# Altium PCB TAG_V2.PcbDoc (part 1 of 2)
Units mm, origin at the board's own origin, x right, y up, seen from the top; angles counter-clockwise.
Board outline 19.13 x 23 mm, 6 copper layers (L1, L2, L3, L4, L5, L6), stack 0.922 mm thick; 120 components, 81 nets, 435 pads, 552 vias.
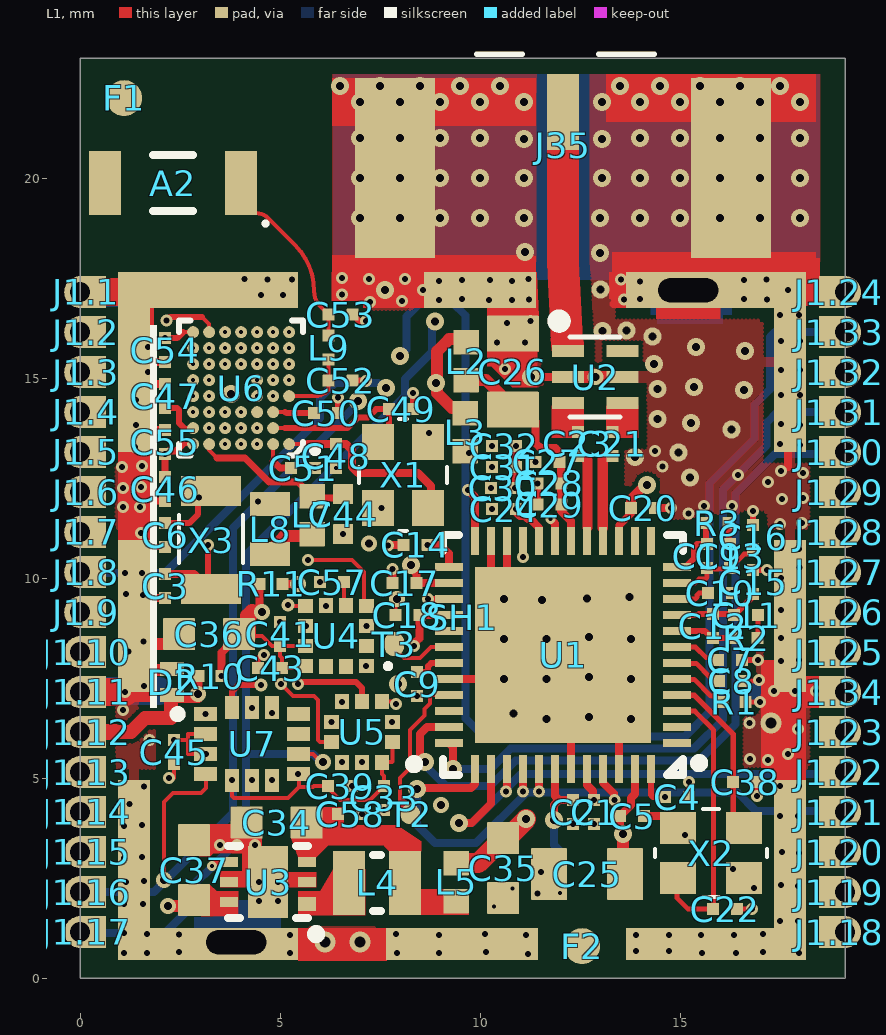
[diagram p0: L1 view]
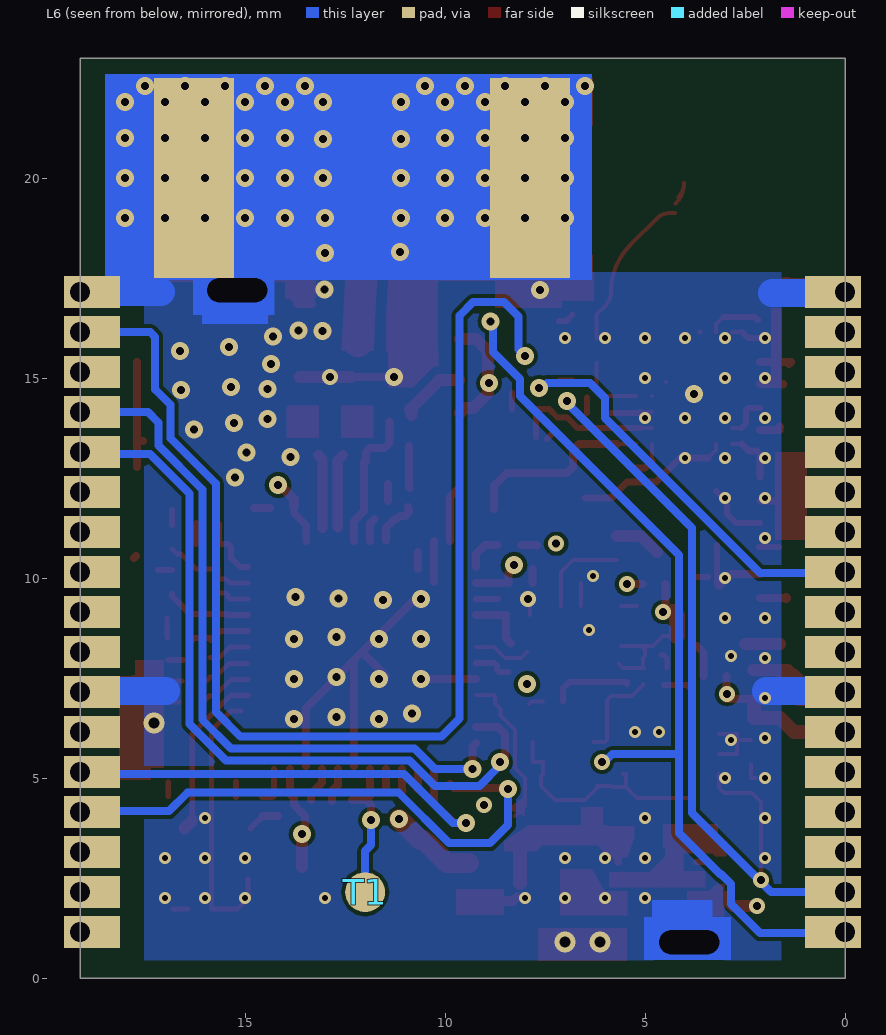
[diagram p1: L6 view, seen from below]
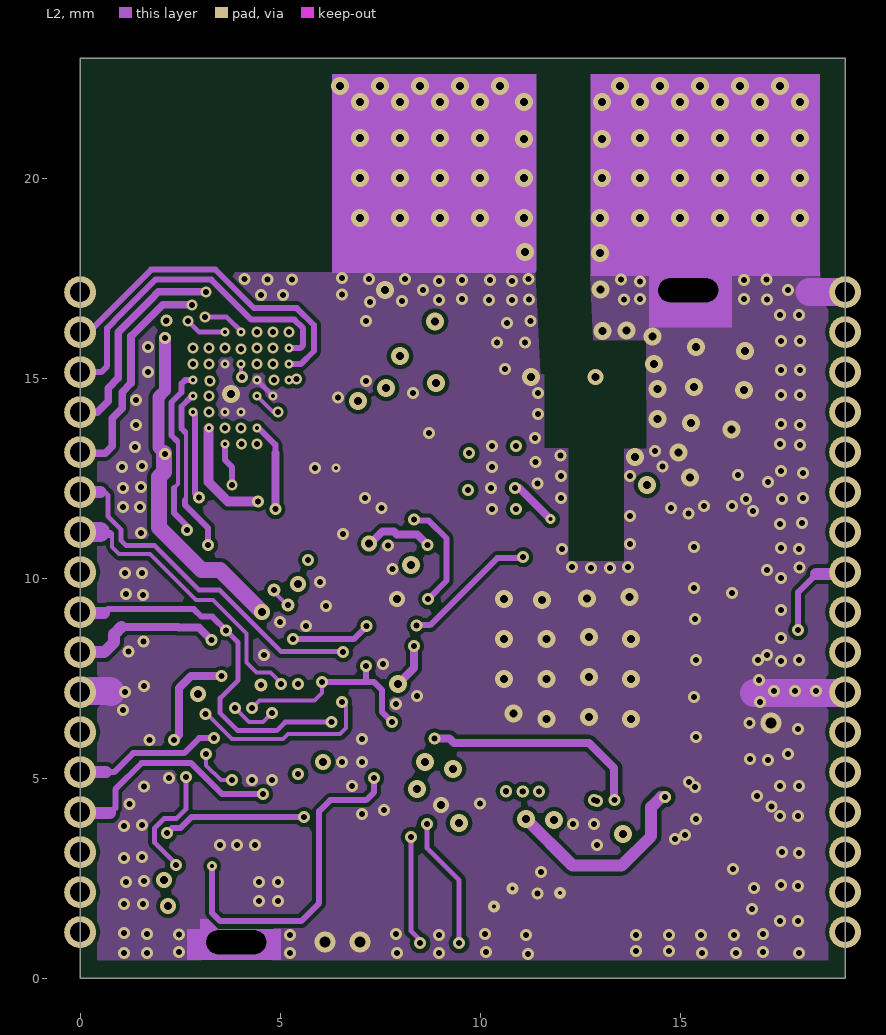
[diagram p2: L2]
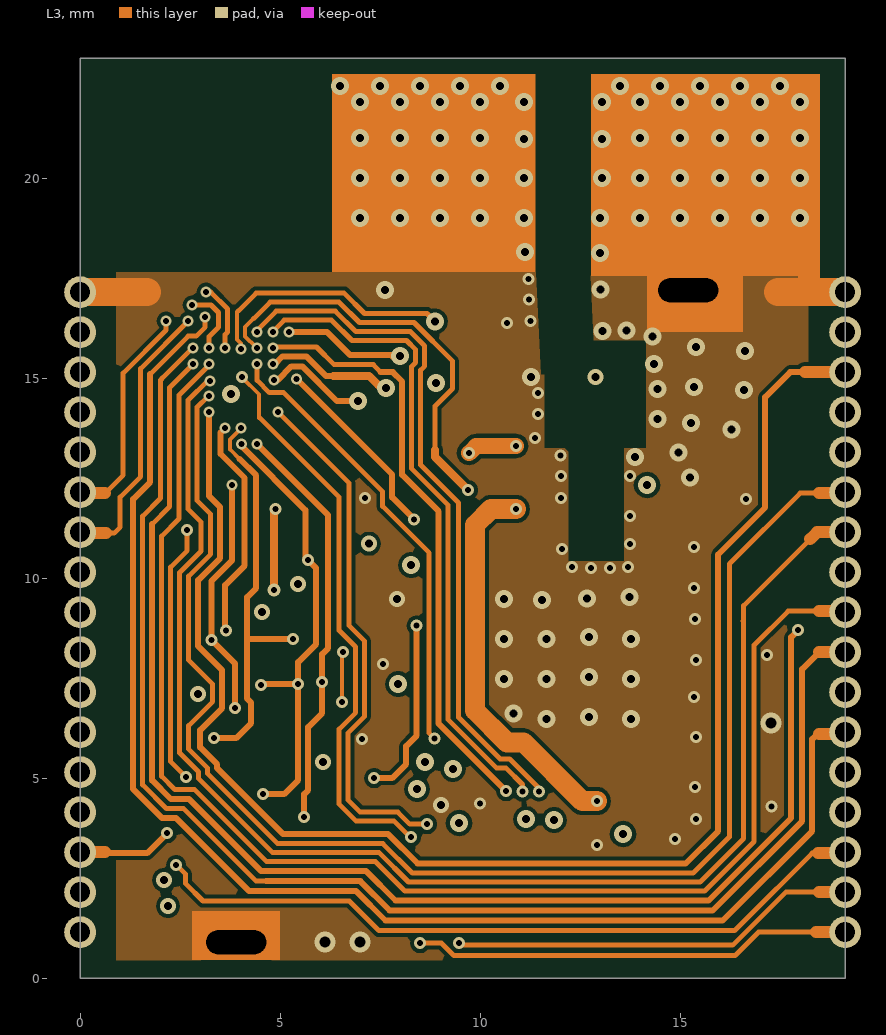
[diagram p3: L3]
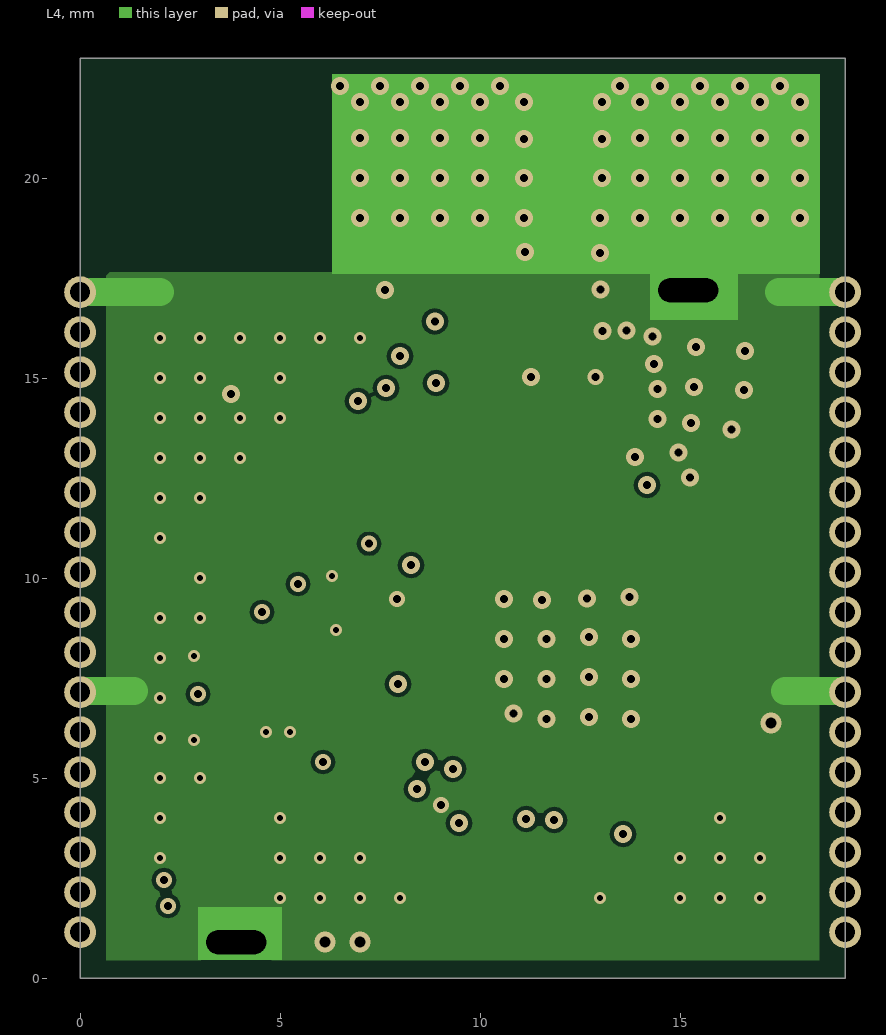
[diagram p4: L4]
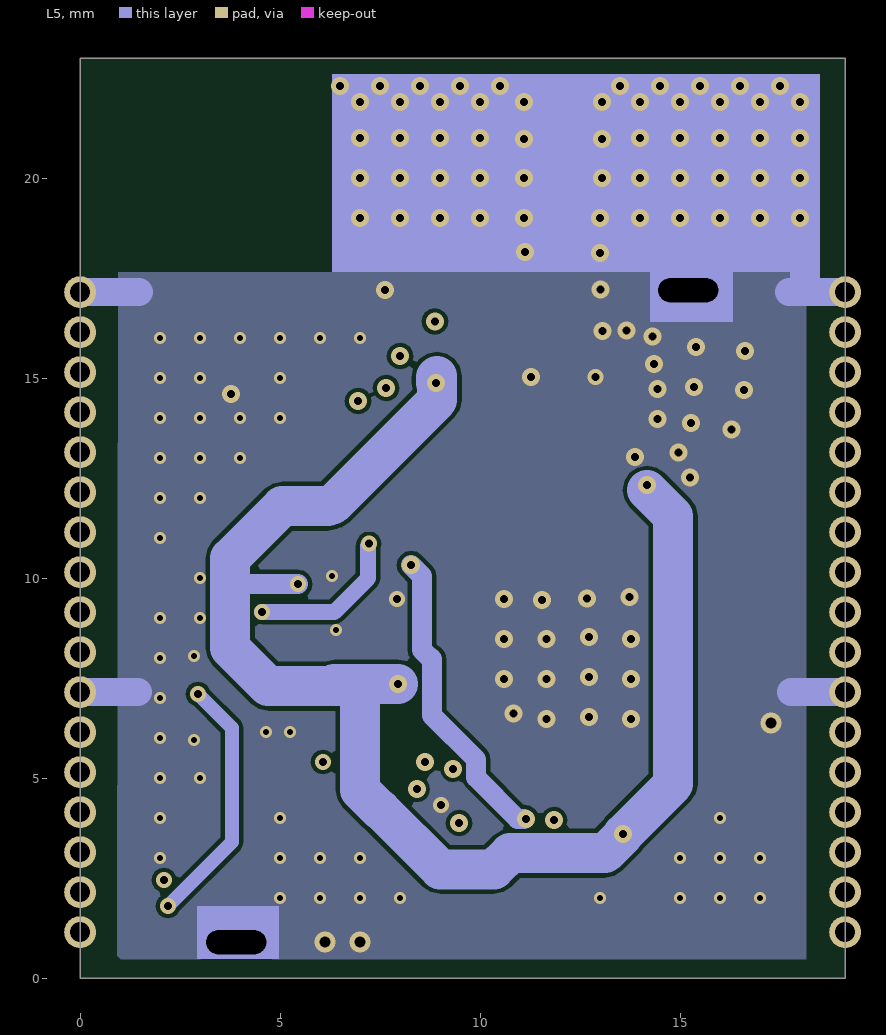
[diagram p5: L5]

## Layer stack, top to bottom
Top Solder: solder mask 0.0127, Solder Resist, Dk 3.5
L1: signal copper 0.029
Dielectric1: prepreg 0.065, Dk 3.8
L2: signal copper 0.029
Dielectric 4: prepreg 0.065, Dk 3.8
L3: signal copper 0.018
Dielectric2: core 0.51, IS400, Dk 4.2
L4: signal copper 0.018
Dielectric 5: prepreg 0.065, Dk 3.8
L5: signal copper 0.029
Dielectric3: prepreg 0.065, Dk 3.8
L6: signal copper 0.029
Bottom Solder: solder mask 0.0127, Solder Resist, Dk 3.5

## Board outline
0,0 0,23 19.125,23 19.125,0

## Design rules (kind name [scope] priority, off if disabled: settings)
Clearance Alearance-ROOM_NRF [WithinRoom('RoomDefinition_nRF')] p1: gap=0.1 ignorepadtopadclearanceinfootprint=FALSE except(0: Arc-Hole Track-Hole SMDPad-Hole THPad-Hole Via-Hole Fill-Hole Poly-Hole Region-Hole Text-Hole)
Clearance Clearance-ANT [InNet('UWB_ANT')] p2: gap=0.265 ignorepadtopadclearanceinfootprint=FALSE except(0: Arc-Hole Track-Hole SMDPad-Hole THPad-Hole Via-Hole Fill-Hole Poly-Hole Region-Hole Text-Hole)
Clearance Clearance-ANT_BT [InNet('BT_ANT')  or InNet('BT_RADIO_ANT')] p3 off: gap=0.2 ignorepadtopadclearanceinfootprint=FALSE except(0: Arc-Hole Track-Hole SMDPad-Hole THPad-Hole Via-Hole Fill-Hole Poly-Hole Region-Hole Text-Hole)
Clearance Clearance_1 [All] p4: gap=0.1 ignorepadtopadclearanceinfootprint=FALSE except(0: Arc-Hole Track-Hole SMDPad-Hole THPad-Hole Via-Hole Fill-Hole Poly-Hole Region-Hole Text-Hole)
ComponentClearance [All] p1 off: gap=0.15 collisioncheckmode=3 verticalgap=0.15 showdistances=FALSE
DiffPairsRouting [All] p1: maxlimit=0.5 minlimit=0.1 mostfreqgap=0.2 toplayer_minwidth=0.1 toplayer_maxwidth=0.381 toplayer_prefwidth=0.22 midlayer1_minwidth=0.1 midlayer1_maxwidth=0.381 midlayer1_prefwidth=0.22 midlayer2_minwidth=0.1 midlayer2_maxwidth=0.381 midlayer2_prefwidth=0.22 midlayer3_minwidth=0.1 midlayer3_maxwidth=0.381 midlayer3_prefwidth=0.22 midlayer4_minwidth=0.1 midlayer4_maxwidth=0.381 midlayer4_prefwidth=0.22 bottomlayer_minwidth=0.1 bottomlayer_maxwidth=0.381 bottomlayer_prefwidth=0.22 maxuncoupledlength=2
HoleSize [All] p1: absolutevalues=TRUE maxlimit=2.54 minlimit=0.1 maxpercent=80.000 minpercent=20.000
HoleToHoleClearance HoleToHoleClearance_1 [InDrillLayerPair('L2 - L3')] p1: gap=0 allowstackedmicrovias=TRUE
HoleToHoleClearance HoleToHoleClearance_2 [InDrillLayerPair('L1 - L2')] p2: gap=0 allowstackedmicrovias=TRUE
HoleToHoleClearance "BGA hole clearance" [HasFootprint('BGA50C40P7X8_295X322X50')] p3: gap=0.1 allowstackedmicrovias=TRUE
HoleToHoleClearance [All] p4: gap=0.254 allowstackedmicrovias=TRUE
MinimumSolderMaskSliver MinimumSolderMaskSliver_2 [(HasFootprint('IC_LGA-12') OR HasFootprint('IC_LGA-14'))] p1: minsoldermaskwidth=0
MinimumSolderMaskSliver MinimumSolderMaskSliver_1 [HasFootprint('HLGA-10L')] p2: minsoldermaskwidth=0
MinimumSolderMaskSliver [All] p3: minsoldermaskwidth=0.1
MinimumSolderMaskSliver "Solder mask dam" [All] p4: minsoldermaskwidth=0.14
PlaneConnect [All] p1: planeconnectstyle=Relief reliefexpansion=0.508 reliefentries=4 reliefconductorwidth=0.3 reliefairgap=0.254
PolygonConnect shield [HasFootprint('BMI-S102')] p1: connectstyle=Relief reliefconductorwidth=0.254 reliefentries=4 polygonreliefangle="90 Angle" airgapwidth=0.254
PolygonConnect SMA [HasFootprint('SMA_KHD3800')] p2: connectstyle=Direct reliefconductorwidth=0.254 reliefentries=4 polygonreliefangle="90 Angle" airgapwidth=0.254
PolygonConnect PolygonConnect_3 [All vs IsNamedPolygon('L1_3V0_L') or IsNamedPolygon('L1_GND2')] p3: connectstyle=Direct reliefconductorwidth=0.254 reliefentries=4 polygonreliefangle="90 Angle" airgapwidth=0.254
PolygonConnect PolygonConnect_2 [InNet('ANT_PCB')] p4: connectstyle=Direct reliefconductorwidth=0.254 reliefentries=4 polygonreliefangle="90 Angle" airgapwidth=0.254
PolygonConnect [IsVia and InNet(gnd) OR InNet('+1V8')  OR InNet('DW+3V3')  OR InNet('+3V3')  OR InNet('+3V3_DW')   OR InNet('NetL1_1')] p5: connectstyle=Direct reliefconductorwidth=0.3 reliefentries=4 polygonreliefangle="90 Angle" airgapwidth=0.2
PolygonConnect PolygonConnect_1 [All] p6: connectstyle=Relief reliefconductorwidth=0.3 reliefentries=4 polygonreliefangle="90 Angle" airgapwidth=0.2
RoutingVias "uVias L2-L3 L4-L5" [((StartLayer='L2') and (StopLayer = 'L3')) or   ((StartLayer='L4') and (StopLayer = 'L5'))] p1: holewidth=0.1 width=0.25 viastyle="Through Hole" minholewidth=0.1 minwidth=0.23 maxholewidth=0.15 maxwidth=0.35
RoutingVias "uVias L1-L2 L5-L6" [((StartLayer='L1') and (StopLayer = 'L2')) or   ((StartLayer='L5') and (StopLayer = 'L6'))] p2: holewidth=0.1 width=0.25 viastyle="Through Hole" minholewidth=0.1 minwidth=0.23 maxholewidth=0.2 maxwidth=0.35
RoutingVias "uVias L1-L6" [((StartLayer='L1') and (StopLayer = 'L6'))] p3: holewidth=0.2 width=0.4 viastyle="Through Hole" minholewidth=0.15 minwidth=0.32 maxholewidth=0.711 maxwidth=0.6
RoutingVias "uVias L3-L4" [((StartLayer='L3') and (StopLayer = 'L4'))] p4: holewidth=0.2 width=0.4 viastyle="Through Hole" minholewidth=0.15 minwidth=0.32 maxholewidth=0.27 maxwidth=0.45
SilkToSilkClearance [All] p1 off: silktosilkclearance=0.1
SilkToSolderMaskClearance [IsPad] p1 off: minsilkscreentomaskgap=0.1 clearancetoexposedcopper=TRUE
SolderMaskExpansion [All] p1: expansion=0.03
ViasUnderSMD [All] p1: allowed=TRUE
Width [All] p1: maxlimit=1 minlimit=0.1 preferedwidth=0.2 checkconnectedcopper=TRUE
22 further rules are at their usual default settings.

## Classes and differential pairs
net class DIFF100: DW_RF_N DW_RF_P
component class "[06] - SPI I2C devices": C33 C39 C41 C43 C45 C57 U4 U5 U7
component class "[03] - CORE MCU": A2 C3 C6 C36 C44 C46 C47 C48 C49 C50 C51 C52 C53 C54 C55 F1 F2 J1.2 J1.3 J1.4 J1.5 J1.6 J1.7 J1.8 J1.9 J1.10 J1.13 J1.14 J1.15 J1.16 J1.17 J1.18 J1.19 J1.20 J1.23 J1.24 J1.25 J1.26 J1.27 J1.28 J1.29 J1.32 J1.33 J14 J18 J27 L7 L8 L9 SH1 U6 X1 X3
component class "[04] - DW radio": C1 C2 C4 C5 C7 C8 C9 C10 C11 C12 C13 C14 C15 C16 C17 C18 C19 C20 C21 C22 C23 C24 C25 C26 C27 C28 C29 C30 C31 C32 C38 J1.21 J1.22 J1.30 J1.31 J35 L2 L3 R1 R2 R3 T1 T2 T3 U1 U2 X2
component class "[05] - Power supply": C34 C35 C37 C58 D2 J1.1 J1.11 J1.12 J1.24 L4 L5 R10 R11 U3 U8
differential pair DW_RF: +DW_RF_P -DW_RF_N
differential pair BALUN_RF: +BALUN_RF_P -BALUN_RF_N

## Components (designator, comment, footprint, x,y, rotation, side; value= is the part's Value field where it differs from the comment)
A2 "AT3216-B2R7HAAT" AT3216 2.325,19.875 r180 top
C1 "100nF" C0201 12.85,4.15 r90 top
C2 "100nF" C0201 12.325,4.15 r90 top
C3 "12pF" C0201 2.125,9.8 r90 top
C4 "100nF" C0201 14.925,4.525 r180 top
C5 "100nF" C0201 13.8,4.05 r180 top
C6 "12pF" C0201 2.125,11.075 r90 top
C7 "100nF" C0201 16.25,7.95 r0 top
C8 "100nF" C0201 16.275,7.425 r0 top
C9 "100nF" C0201 8.425,7.35 r270 top
C10 "100nF" C0201 16,9.625 r0 top
C11 "27pF" C0201 16.65,9.075 r0 top
C12 "1.2pF" C0201 15.825,8.8 r270 top
C13 "820pF" C0201 16.25,10.55 r270 top
C14 "100nF" C0201 8.39,10.83 r0 top
C15 "100nF" C0201 16.825,9.9 r270 top
C16 "100nF" C0201 16.825,11.025 r270 top
C17 "100nF" C0201 8.11,9.875 r0 top
C18 "100nF" C0201 8.18,9.075 r0 top
C19 "18pF" C0201 15.675,10.55 r270 top
C20 "10nF" C0201 14.075,11.75 r0 top
C21 "12pF" C0201 13.305,13.355 r270 top
C22 "12pF" C0201 16.125,1.725 r180 top
C23 "12pF" C0201 12.445,13.355 r270 top
C24 "100nF" C0201 10.6,11.725 r0 top
C25 "47uF" C0805 12.675,2.6 r0 top
C26 "22uF" C0805 10.82,15.16 r270 top
C27 "100nF" C0201 11.68,12.9 r0 top
C28 "330pF" C0201 11.73,12.37 r0 top
C29 "12pF" C0201 11.73,11.84 r0 top
C30 "12pF" C0201 10.575,12.25 r0 top
C31 "330pF" C0201 10.6,12.775 r0 top
C32 "100nF" C0201 10.6,13.3 r0 top
C33 "100nF" C0201 7.6,4.5 r90 top
C34 "10uF" C0603 4.915,3.89 r0 top
C35 "4.7uF" C0603 10.575,2.75 r90 top
C36 "10uF" C0603 3.225,8.6 r0 top
C37 "10uF" C0603 2.85,2.7 r270 top
C38 "12pF" C0201 16.625,4.9 r180 top
C39 "100nF" C0201 6.5,4.8 r180 top
C41 "100nF" C0201 5,8.6 r270 top
C43 "100nF" C0201 4.75,7.75 r0 top
C44 "1uF" C0402 6.575,11.6 r90 top
C45 "100nF" C0201 2.35,5.65 r90 top
C46 "12pF" C0201 2.125,12.225 r90 top
C47 "100nF" C0201 2.125,14.55 r270 top
C48 "12pF" C0201 6.4,13.05 r90 top
C49 "12pF" C0201 8.025,14.225 r180 top
C50 "100pF" C0201 6.15,14.125 r180 top
C51 "100pF" C0201 5.575,12.75 r180 top
C52 "1pF" C0201 6.515,14.935 r180 top
C53 "TBD" C0201 6.515,16.585 r180 top
C54 "100nF" C0201 2.125,15.7 r90 top
C55 "12pF" C0201 2.125,13.4 r270 top
C57 "220nF" C0201 6.3,9.9 r0 top
C58 "22pF" C0201 6.75,4.1 r180 top
D2 "5V0 ESD" DFN65P100X40-2N 2.3,7.4 r90 top
F1 "FIDUCIAL" FID1#1 1.1,22 r0 top
F2 "FIDUCIAL" FID1#2 12.55,0.8 r0 top
J1.1 "EDGE_PIN" PCB_EDGE_1MM 0,17.15 r90 top
J1.2 "EDGE_PIN" PCB_EDGE_1MM 0,16.15 r90 top
J1.3 "EDGE_PIN" PCB_EDGE_1MM 0,15.15 r90 top
J1.4 "EDGE_PIN" PCB_EDGE_1MM 0,14.15 r90 top
J1.5 "EDGE_PIN" PCB_EDGE_1MM 0,13.15 r90 top
J1.6 "EDGE_PIN" PCB_EDGE_1MM 0,12.15 r90 top
J1.7 "EDGE_PIN" PCB_EDGE_1MM 0,11.15 r90 top
J1.8 "EDGE_PIN" PCB_EDGE_1MM 0,10.15 r90 top
J1.9 "EDGE_PIN" PCB_EDGE_1MM 0,9.15 r90 top
J1.10 "EDGE_PIN" PCB_EDGE_1MM 0,8.15 r90 top
J1.11 "EDGE_PIN" PCB_EDGE_1MM 0,7.15 r90 top
J1.12 "EDGE_PIN" PCB_EDGE_1MM 0,6.15 r90 top
J1.13 "EDGE_PIN" PCB_EDGE_1MM 0,5.15 r90 top
J1.14 "EDGE_PIN" PCB_EDGE_1MM 0,4.15 r90 top
J1.15 "EDGE_PIN" PCB_EDGE_1MM 0,3.15 r90 top
J1.16 "EDGE_PIN" PCB_EDGE_1MM 0,2.15 r90 top
J1.17 "EDGE_PIN" PCB_EDGE_1MM 0,1.15 r90 top
J1.18 "EDGE_PIN" PCB_EDGE_1MM 19.125,1.15 r270 top
J1.19 "EDGE_PIN" PCB_EDGE_1MM 19.125,2.15 r270 top
J1.20 "EDGE_PIN" PCB_EDGE_1MM 19.125,3.15 r270 top
J1.21 "EDGE_PIN" PCB_EDGE_1MM 19.125,4.15 r270 top
J1.22 "EDGE_PIN" PCB_EDGE_1MM 19.125,5.15 r270 top
J1.23 "EDGE_PIN" PCB_EDGE_1MM 19.125,6.15 r270 top
J1.24 "EDGE_PIN" PCB_EDGE_1MM 19.125,17.15 r270 top
J1.25 "EDGE_PIN" PCB_EDGE_1MM 19.125,8.15 r270 top
J1.26 "EDGE_PIN" PCB_EDGE_1MM 19.125,9.15 r270 top
J1.27 "EDGE_PIN" PCB_EDGE_1MM 19.125,10.15 r270 top
J1.28 "EDGE_PIN" PCB_EDGE_1MM 19.125,11.15 r270 top
J1.29 "EDGE_PIN" PCB_EDGE_1MM 19.125,12.15 r270 top
J1.30 "EDGE_PIN" PCB_EDGE_1MM 19.125,13.15 r270 top
J1.31 "EDGE_PIN" PCB_EDGE_1MM 19.125,14.15 r270 top
J1.32 "EDGE_PIN" PCB_EDGE_1MM 19.125,15.15 r270 top
J1.33 "EDGE_PIN" PCB_EDGE_1MM 19.125,16.15 r270 top
J1.34 "EDGE_PIN" PCB_EDGE_1MM 19.125,7.15 r270 top
J35 "SMA/FLANGE" SMA_KHD3800 12.075,21.7 r270 top
L2 "BLM15AG601SN1D" INDC1005X05N 9.65,15.425 r270 top
L3 "BLM15AG601SN1D" INDC1005X05N 9.625,13.65 r90 top
L4 "CKP20164R7M-T" INDC2016X10N 7.425,2.375 r0 top
L5 "15nH" INDC1005X05N 9.4,2.4 r90 top
L7 "15nH" INDC1005X05N 5.8,11.575 r90 top
L8 "10uH" L0603 4.75,11.225 r270 top
L9 "3.3nH" L0201 6.215,15.76 r90 top
R1 "11k" R0201 16.35,6.9 r0 top
R2 "16k" R0201 16.65,8.5 r180 top
R3 "270R" R0201 15.925,11.375 r0 top
R10 "0R" R0201 3.25,7.55 r0 top
R11 "0R" R0201 4.775,9.85 r180 top
SH1 "BMI-S-102" BMI-S102 0.9,0.4 r0 top locked
T1 "TestPAD" Testpad#1 12,2.15 r180 bottom
T2 "TestPAD" Testpad#2 8.25,4.1 r0 top
T3 "TestPAD" Testpad#3 7.85,8.35 r0 top
U1 "DW1000 IC" QFN-48_DW1000 12.075,8.075 r180 top
U2 "HHM1595A1" BALUN_HHM1595A1 12.875,15.025 r270 top
U3 "XC9258B18CER-G" USP-6C 4.7,2.4 r180 top
U4 "LIS2MDLTR" IC_LGA-12 6.4,8.55 r180 top
U5 "LPS22HBTR" HLGA-10L 7.05,6.15 r180 top
U6 "NRF52832-CIAA" BGA50C40P7X8_295X322X50 4.025,14.75 r180 top locked
U7 "LSM6DSLTR" IC_LGA-14 4.3,5.85 r0 top
X1 "32.00 MHz - 2CAS" ABM10 8.075,12.575 r90 top
X2 "38.4000MHz-2CAT" ABM10 15.775,3.125 r0 top
X3 "32.768KHZ-KCBB" XTAL_SMD_3.2X1.5MM 3.275,12.175 r270 top

## Footprints (in the part's own frame and the unit in brackets; to place one, negate y for a bottom-side part, rotate by r counter-clockwise, add the part's x,y. Pads: shape width x height; smd on the part's side, far side on the other; paste and mask are expansions set on the pad)
ABM10 [mm]
  rrect1% 0.9x0.8 smd: 1(-0.825,-0.625) 2(0.825,-0.625) 3(0.825,0.625) 4(-0.825,0.625)
  silkscreen extent -1.4,-1.1 1.4,1.1, body extent -1.24,-1 1.24,1, height 0.51
AT3216 [mm] "Chip Antenna 2-Leads, Body 3,20x1,60mm"
  rect 0.8x1.6 smd: 1(-1.7,0) 2(1.7,0)
  silkscreen extent -2.36,-0.7 0.5,1.06, body extent -1.7,-0.9 1.7,0.9, height 1.41
BALUN_HHM1595A1 [mm]
  rect 0.3x0.8 smd: 1(-0.65,-0.68) 2(0,-0.68) 3(0.65,-0.68) 4(0.65,0.68) 5(0,0.68) 6(-0.65,0.68)
  silkscreen extent -1.54,-1.04 1,0.63, body extent -1,-0.62 1,0.63, height 0.8
BGA50C40P7X8_295X322X50 [mm]
  round 0.3 smd mask-0.03: A1(-1.2,1.4) A2(-0.8,1.4) A3(-0.4,1.4) A4(0,1.4) A5(0.4,1.4) A6(0.8,1.4) A7(1.2,1.4) B2(-0.8,1) B3(-0.4,1) B4(0,1) B5(0.4,1) B6(0.8,1) B7(1.2,1) C2(-0.8,0.6) C3(-0.4,0.6) C4(0,0.6) C5(0.4,0.6) C6(0.8,0.6) C7(1.2,0.6) D1(-1.2,0.2) D2(-0.8,0.2) D3(-0.4,0.2) D6(0.8,0.2) D7(1.2,0.2) E1(-1.2,-0.2) E2(-0.8,-0.2) E3(-0.4,-0.2) E6(0.8,-0.2) E7(1.2,-0.2) F1(-1.2,-0.6) F2(-0.8,-0.6) F3(-0.4,-0.6) F4(0,-0.6) F5(0.4,-0.6) F6(0.8,-0.6) F7(1.2,-0.6) G1(-1.2,-1) G2(-0.8,-1) G3(-0.4,-1) G4(0,-1) G5(0.4,-1) G6(0.8,-1) G7(1.2,-1) H1(-1.2,-1.4) H2(-0.8,-1.4) H3(-0.4,-1.4) H4(0,-1.4) H5(0.4,-1.4) H6(0.8,-1.4) H7(1.2,-1.4)
  silkscreen extent -1.9,-1.69 1.55,1.69, body extent -1.48,-1.61 1.48,1.61, height 0.51
BMI-S102 [mm]
  rect 0.8x4.5 smd: 0(0.45,2.3) 0(0.45,15) 0(16.85,2.3) 0(16.85,15)
  rect 0.8x3.8 smd: 0(0.45,8.65) 0(16.85,8.65)
  rect 4.5x0.8 smd: 0(2.3,0.45) 0(15,0.45)
  rect 4.5x0.9 smd: 0(2.3,16.8) 0(15,16.8)
  rect 3.8x0.8 smd: 0(8.65,0.45)
  rect 2.8x0.9 smd: 0(9.1,16.8)
  body extent 0.4,0.35 16.9,16.85, height 3.6
C0201 [mm]
  rrect5% 0.3x0.3 smd: 1(-0.3,0) 2(0.3,0)
  body extent -0.3,-0.15 0.3,0.15, height 0.3
C0402 [mm]
  rrect5% 0.5x0.5 smd: 1(-0.5,0) 2(0.5,0)
  body extent -0.5,-0.25 0.5,0.25, height 0.56
C0603 [mm]
  rrect5% 0.8x0.8 smd: 1(-0.75,0) 2(0.75,0)
  body extent -0.8,-0.42 0.8,0.44, height 0.95
C0805 [mm]
  rrect5% 0.9x1.3 smd: 1(-0.95,0) 2(0.95,0)
  body extent -1,-0.6 1,0.6, height 1.5
DFN65P100X40-2N [mm]
  rect 0.35x0.6 smd: A(0.325,0) K(-0.325,0)
  body extent -0.53,-0.33 0.53,0.33, height 0.41
FID1#1 [mm]
  round 0.9 smd paste-0.5 mask+0.5: A1(0,0)
  L1 pour cut-out: -0.925,-0.5 -0.591,-0.868 -0.124,-1.039 0.368,-0.974 0.775,-0.689 1.003,-0.247 1,0.25 1,0.25 0.765,0.691 0.352,0.972 -0.144,1.028 -0.609,0.847 -0.937,0.47 -1.051,-0.017 -0.925,-0.5
FID1#2 [mm]
  round 0.9 smd paste-0.5 mask+0.4: A1(0,0)
  L1 pour cut-out: -0.925,-0.5 -0.591,-0.868 -0.124,-1.039 0.368,-0.974 0.775,-0.689 1.003,-0.247 1,0.25 1,0.25 0.765,0.691 0.352,0.972 -0.144,1.028 -0.609,0.847 -0.937,0.47 -1.051,-0.017 -0.925,-0.5
HLGA-10L [mm]
  rect 0.375x0.35 smd paste-0.04 mask+0.1: 1(-0.763,0.25) 2(-0.763,-0.25) 6(0.763,-0.25) 7(0.763,0.25)
  rect 0.35x0.375 smd paste-0.04 mask+0.1: 3(-0.5,-0.763) 4(0,-0.763) 5(0.5,-0.763) 8(0.5,0.763) 9(0,0.763) 10(-0.5,0.763)
  silkscreen extent -1.4,0.7 -1.2,0.9, body extent -1,-1 1,1, height 0.76
IC_LGA-12 [mm] "LIS2MDL"
  rect 0.375x0.35 smd paste-0.04 mask+0.1: 1(-0.763,0.75) 2(-0.763,0.25) 3(-0.763,-0.25) 4(-0.763,-0.75) 7(0.763,-0.75) 8(0.763,-0.25) 9(0.763,0.25) 10(0.763,0.75)
  rect 0.35x0.375 smd paste-0.04 mask+0.1: 5(-0.25,-0.763) 6(0.25,-0.763) 11(0.25,0.763) 12(-0.25,0.763)
  silkscreen extent -1.33,0.72 -1.27,0.78, body extent -1,-1 1,1, height 0.7
IC_LGA-14 [mm] "LSM6DSL"
  rect 0.575x0.35 smd paste-0.04 mask+0.1: 1(-1.162,0.75) 2(-1.162,0.25) 3(-1.162,-0.25) 4(-1.162,-0.75) 8(1.162,-0.75) 9(1.162,-0.25) 10(1.162,0.25) 11(1.162,0.75)
  rect 0.35x0.575 smd paste-0.04 mask+0.1: 5(-0.5,-0.913) 6(0,-0.913) 7(0.5,-0.913) 12(0.5,0.913) 13(0,0.913) 14(-0.5,0.913)
  silkscreen extent -1.96,0.65 -1.76,0.85, body extent -1.5,-1.25 1.5,1.25, height 0.85
INDC1005X05N [mm]
  rrect5% 0.61x0.64 smd: 1(-0.475,0) 2(0.475,0)
  body extent -0.55,-0.3 0.55,0.3, height 0.5
INDC2016X10N [mm]
  rect 0.8x1.6 smd: 1(-0.7,0) 2(0.7,0)
  silkscreen extent -0.1,-0.7 0.1,0.7, body extent -1.1,-0.9 1.1,0.9, height 1
L0201 [mm]
  rect 0.3x0.3 smd: 1(-0.3,0) 2(0.3,0)
  body extent -0.32,-0.17 0.32,0.17, height 0.3
L0603 [mm]
  rrect5% 0.6x1 smd: 1(-0.625,0) 2(0.625,0)
  body extent -0.9,-0.5 0.9,0.5, height 1
PCB_EDGE_1MM [mm] "PCB EDGE PIN"
  round 0.8 hole 0.5: 0(0,0)
  rect 0.8x0.7 smd paste-0.4: 0(0,-0.3)
  rect 0.8x1.4 smd far side: 0(0,-0.3)
QFN-48_DW1000 [mm]
  rect 0.7x0.2 smd: 1(-2.85,2.2) 2(-2.85,1.8)
  rect 0.7x0.2 smd mask+0.05: 3(-2.85,1.4) 4(-2.85,1) 5(-2.85,0.6) 6(-2.85,0.2) 7(-2.85,-0.2) 8(-2.85,-0.6) 9(-2.85,-1) 10(-2.85,-1.4) 11(-2.85,-1.8) 12(-2.85,-2.2) 25(2.85,-2.2) 26(2.85,-1.8) 27(2.85,-1.4) 28(2.85,-1) 29(2.85,-0.6) 30(2.85,-0.2) 31(2.85,0.2) 32(2.85,0.6) 33(2.85,1) 34(2.85,1.4) 35(2.85,1.8) 36(2.85,2.2)
  rect 0.2x0.7 smd mask+0.05: 13(-2.2,-2.85) 14(-1.8,-2.85) 15(-1.4,-2.85) 18(-0.2,-2.85) 19(0.2,-2.85) 20(0.6,-2.85) 21(1,-2.85) 22(1.4,-2.85) 23(1.8,-2.85) 24(2.2,-2.85) 37(2.2,2.85) 38(1.8,2.85) 39(1.4,2.85) 40(1,2.85) 41(0.6,2.85) 42(0.2,2.85) 43(-0.2,2.85) 44(-0.6,2.85) 45(-1,2.85) 46(-1.4,2.85) 47(-1.8,2.85)
  rect 0.2x0.7 smd: 16(-1,-2.85) 17(-0.6,-2.85) 48(-2.2,2.85)
  rect 4.4x4.4 smd paste-4.4 mask+0.05: EP(0,0)
  rect 1.3x1.3 on Top Paste mask+0.05: Paste1(0,0) Paste2(-1.45,1.45) Paste3(-1.45,-1.45) Paste4(1.45,-1.45) Paste5(1.45,1.45) Paste6(1.45,0) Paste7(-1.45,0) Paste8(0,1.45) Paste9(0,-1.45)
  silkscreen extent -3.5,-3 3,3, body extent -3,-3 3,3, height 1
R0201 [mm]
  rrect5% 0.3x0.3 smd mask+0.04: 1(-0.285,0) 2(0.285,0)
  body extent -0.3,-0.15 0.3,0.15, height 0.32
SMA_KHD3800 [mm]
  rect 1.9x0.8 smd: 1(0.05,0)
  rect 4.5x2 smd: 2(1.45,4.2) 3(1.45,-4.2)
  rect 5x2 smd far side: 4(1.7,4.2) 5(1.7,-4.2)
  silkscreen extent -1.4,-2.16 -1.4,2.29
Testpad#1 [mm]
  round 1 smd paste-0.5: 1(0,0)
Testpad#2 [mm]
  round 0.5 smd paste-0.5: 1(0,0)
Testpad#3 [mm]
  oval 0.5x0.6 smd paste-0.5: 1(0,0)
USP-6C [mm]
  rect 1x1.8 smd paste-1.8: 0(0,0)
  rect 0.45x0.35 smd paste-0.04: 1(-0.975,0.55)
  rect 0.45x0.25 smd paste-0.04: 2(-0.975,0) 3(-0.975,-0.5) 4(0.975,-0.5) 5(0.975,0) 6(0.975,0.5)
  rect 0.8x0.3 on Top Paste paste+0: Paste1(0,0.45) Paste2(0,-0.45)
  rect 0.5x0.1 on Top Paste paste+0: Paste3(0,0.65) Paste4(0,-0.65)
  silkscreen extent -1.3,-0.9 1,1.4, body extent -1,-0.9 1,0.9, height 0.6
XTAL_SMD_3.2X1.5MM [mm]
  rect 0.75x1.5 smd: 1(0,0) 2(2.45,0)
  silkscreen extent 0.6,-0.8 1.8,0.8, body extent -0.37,-0.75 2.83,0.75, height 0.9

## Part data
A2: "CHIP, 2.45GHZ, 50 OHM, 3.2x1.6 ACX - AAT3216-B2R7HAAT- ANTENNA"
C1 C2 C4 C5 C7 C8 C9 C10 C14 C15 C16 C17 C18 C24 C27 C32 C33 C39 C41 C43 C45 C47 C54: library part GRM033C81E104ME14D, "CAP CER 0.1UF 25V X6S 0201"
C3 C6 C21 C22 C23 C29 C30 C38 C46 C48 C49 C55: library part GRM0335C1E120JA01D, "CAP CER 12PF 25V NP0 0201"
C11: library part GRM0335C1E270JA01D, "CAP CER 27PF 25V NP0 0201"
C12: library part GRM0335C1E1R2CA01D, "CAP CER 1.2PF 25V NP0 0201"
C13: library part GRM033R71E821KA01D, "CAP CER 820PF 25V X7R 0201"
C19: library part GRM0335C1H180JA01D, "CAP CER 18PF 50V NP0 0201"
C20: library part GRM033R61E103KA12D, "CAP CER 10000PF 25V X5R 0201"
C25: library part GRM21BR60J226ME39L, "CAP CER 47UF 6.3V X5R 0603"
C26: library part GRM21BR60J226ME39L, "CAP CER 22UF 6.3V X5R 0805"
C28 C31: library part GRM033R71E331KA01D, "CAP CER 330PF 25V X7R 0201"
C34 C36: library part GRM188R60J106ME84D, "CAP CER 10UF 6.3V X5R 0603"
C35: library part CL10A475KQ8NNN#, "CAP CER 4.7UF 6.3V X5R 0603"
C37: library part CL10A475KQ8NNN#, "CAP CER 10UF 6.3V X5R 0603"
C44: library part GRM155R61A105KE15D, "CAP CER 1UF 10V X5R 0402"
C50 C51: library part GRM0335C1E101JA01D, "CAP CER 100PF 25V NP0 0201"
C52 C53: library part GRM0335C1H1R0BA01D, "CAP CER 1PF 50V NP0 0201"
C57: library part GRM033C81E104ME14D, "CAP CER 220NF 25V X6S 0201"
C58: library part GRM0335C1E100JA01D, "CAP CER 22PF 25V NP0 0201"
D2: library part DF2S6.2CT,L3F, "TVS DIODE 5VWM"
F1 F2: library part FID1, "Fiducial 1mm"
J1.1 J1.2 J1.3 J1.4 J1.5 J1.6 J1.7 J1.8 J1.9 J1.10 J1.11 J1.12 J1.13 J1.14 J1.15 J1.16 J1.17 J1.18 J1.19 J1.20 J1.21 J1.22 J1.23 J1.24 J1.25 J1.26 J1.27 J1.28 J1.29 J1.30 J1.31 J1.32 J1.33 J1.34: "PCB Edge pin"
J35: "SMA FLANGE JACK"
L2 L3: "FERRITE BEAD 600 OHM 0402 1LN"
L4: library part CKP20162R2M-T, "FIXED IND 2.2UH 1.2A 110 MOHM"
L5 L7: library part HK100515NJ-T, "FIXED IND 15NH 320MA 460 MOHM"
L8: library part LBMF1608T100K, "FIXED IND 10UH 80MA 360 MOHM SMD"
L9: library part LQP03TG3N3C02D, "FIXED IND 3.3NH 400MA 320 MOHM"
R1: library part RC0201FR-0711KL, "RES SMD 11K OHM 1% 1/20W 0201"
R2: library part RC0201FR-0716KL, "RES SMD 16K OHM 1% 1/20W 0201"
R3: library part RC0201FR-07270RL, "RES SMD 270 OHM 1% 1/20W 0201"
R10 R11: library part RC0201JR-070RL, "RES SMD 0.0OHM JUMPER 1/20W 0201"
SH1: "BOARD SHIELD .65X.65\" 1PIECE"
U1: library part DW1000_QFN_48, "UWB DW1000 QFN48"
U2: library part IND_BALUN_HHM1595A1, "Mulitilayer Balun"
U3: library part XC9257/8
U4: library part LIS2MDL
U5: library part LPS22HB
U6: library part NRF52832-CIAA-R, "IC RF TXRX+MCU BLUETOOTH 50WLCSP"
U7: library part LSM6DSL
X1 X2: library part ABM10
X3: library part ABS06-32.768KHZ-T, "CRYSTAL 32.7680KHZ 12.5PF SMD"

## Free pads (board coordinates)
  round 0.5 hole 0.6 slot 1.5 at 0 deg: 0(3.9,0.9) 1(15.2,17.2)

## Via types
v1: diameter 0.3, hole 0.15, L1 to L2, tented top, 223 vias
v2: diameter 0.45, hole 0.2, L1 to L6, tented both sides, 106 vias
v3: diameter 0.3, hole 0.15, L2 to L3, 65 vias
v4: diameter 0.3, hole 0.15, L4 to L6, tented bottom, 51 vias
v5: diameter 0.23, hole 0.1, L1 to L2, tented top, 40 vias
v6: diameter 0.275, hole 0.15, L2 to L3, 29 vias
v7: diameter 0.3, hole 0.15, L1 to L2, 11 vias
v8: diameter 0.4, hole 0.2, L1 to L6, tented both sides, 9 vias
v9: diameter 0.3, hole 0.15, L1 to L3, tented top, 4 vias
v10: diameter 0.3, hole 0.1, L1 to L2, 3 vias
v11: diameter 0.52, hole 0.27, L1 to L6, tented bottom, 3 vias
v12: diameter 0.25, hole 0.1, L1 to L2, tented top, 2 vias
v13: diameter 0.32, hole 0.15, L1 to L2, tented both sides, 1 vias
v14: diameter 0.32, hole 0.15, L1 to L2, tented top, 1 vias
v15: diameter 0.3, hole 0.15, L2 to L3, tented both sides, 1 vias
v16: diameter 0.4, hole 0.2, L1 to L6, tented top, 1 vias
v17: diameter 0.32, hole 0.15, L2 to L3, tented both sides, 1 vias
v18: diameter 0.3, hole 0.15, L2 to L3, tented top, 1 vias

## Nets (pads, with @x,y where several pads share a name; then routed paths per layer and width w, separated by ;. In a path a pad name is that pad's centre, name@x,y a point inside that pad or via, vN(x,y) a via of type N, cw(c..) or ccw(c..) an arc to the next point about the centre after c; other vN are vias at no path point)
+1V8: C4.2 C17.2 C35.2 L5.2 U1.26 U1.48 | length 16.9
  L1 w0.15: U1.48@14.275,5.225 14.275,4.575 14.325,4.525 C4.2@14.575,4.525
  L1 w0.2: v2@8.275,10.25 8.41,10.115 C17.2@8.41,9.875 ; C17.2@8.55,9.875 U1.26@9.225,9.875
  L1 w0.5: L5.2@9.4,2.875 9.95,2.875 C35.2@10.45,3.375 ; C35.2@10.55,3.45 10.625,3.45 v2(11.15,3.975)
  L2 w0.3: v2(11.15,3.975) 12.31,2.815 13.54,2.815 14.275,3.55 14.275,4.275 14.525,4.525 v1(14.625,4.525)
  L5 w0.5: v2(8.275,10.325) 8.55,10.05 8.55,8.2 8.75,8 ; 8.762,8.013 8.8,7.975 8.8,6.56 8.803,6.56 9.895,5.468 9.895,5.018 10.933,3.98 v2@11.1,3.98
+3V0: C5.2 C18.2 C20.1 C25.2 L2.1 L3.2 R11.1 U1.15 U1.28 U1.47 | length 46.4
  L1 w0.19: U1.15@13.475,10.925 13.475,11.325 13.775,11.625 C20.1@13.775,11.8
  L1 w0.2: R11.1@5.06,9.85 v8@5.525,9.85 ; v1@8.35,8.365 8.48,8.495 C18.2@8.48,9.075 U1.28@9.225,9.075 ; v2@13.5,3.625 C5.2@13.5,4.05 13.775,4.325 13.775,4.5 13.875,4.6 U1.47@13.875,5.225
  L1 w0.25: C20.1@13.775,11.8 13.775,11.975 v2@14.125,12.325
  L1 w0.3: L2.1@9.625,15.975 9.225,15.975 8.925,15.675 8.925,14.625 9.3,14.25 9.505,14.25 L3.2@9.63,14.125 ; C25.2@13.575,2.775 v2(13.575,3.6)
  L2 w0.2: v2(7.95,7.35) 8.35,7.75 v1(8.35,8.3)
  L5 w0.5: 3.95,9.85 v8(5.45,9.85)
  L5 w1: 6.2,11.8 5.05,11.8 3.75,10.5 3.75,8.25 4.7,7.3 7,7.3 7,4.7 7.5,4.2 ; 6.312,11.837 8.925,14.45 8.925,15.05 8.9,15.025 v2(8.9,14.876) ; 6.35,7.35 v2(7.95,7.35) ; 7.51,4.21 9,2.72 10.345,2.72 10.75,3.125 13.125,3.125 v2@13.6,3.6 ; v2(13.575,3.6) 14.825,4.85 14.825,11.55 v2@14.175,12.2
  other v2: 14.175,12.325
ACC_BAR_SDO: J1.6.0 U5.5 U6.H6 U7.1 | length 21.5
  L1 w0.1: 3.045,16.53 3.225,16.35 U6.H6@3.225,16.15
  L1 w0.15: v7@2.175,16.45 2.255,16.53 3.045,16.53
  L2 w0.1: v7(3.137,6.6) 3.174,6.6 3.799,5.975 5.07,5.975 5.195,6.1 6.5,6.1 6.648,6.248 6.648,6.802 v1(6.55,6.9)
  L2 w0.125: 0.51,12.15 0.535,12.125 0.65,12.125 0.7,12.075 0.7,11.538 1.025,11.213 1.025,10.938 1.15,10.813 1.862,10.813 2.975,9.7 3.487,9.7 5.025,8.162 6.563,8.162 v3(6.575,8.15)
  L2 w0.3: J1.6.0@0,12.15 0.51,12.15
  L3 w0.1: v1(6.55,6.9) 6.55,8.125 v3(6.575,8.15)
  L3 w0.125: 0.625,12.125 1.075,12.575 1.075,15.125 2.149,16.199 v6(2.149,16.425)
  L3 w0.3: J1.6.0@-0.05,12.125 0.625,12.125
  other v3: 6.55,6.9
  other v7: 2.16,16.435
ACC_CS: J1.10.0 U6.A5 U7.12 | length 12.2
  L2 w0.1: v3(3.875,6.75) 4.226,6.4 4.575,6.4 v7(4.8,6.625)
  L2 w0.15: v5(3.625,13.35) 3.625,12.95 3.8,12.775 v6(3.8,12.325)
  L2 w0.2: 1.03,8.78 2.45,8.78 2.47,8.76 2.975,8.76 v3(3.28,8.455)
  L2 w0.3: J1.10.0@0,8.15 0.6,8.15 0.85,8.4 0.85,8.6 1.03,8.78
  L3 w0.1: v3(3.875,6.75) 3.899,6.727 v3@3.899,6.649
  L3 w0.15: v6(3.8,12.325) 3.8,10.445 3.28,9.925 v3(3.28,8.455) 3.875,7.86 v3(3.875,6.75)
BALUN_RF_N: C23.1 U2.3
BALUN_RF_P: C21.1 U2.4
BAR_CS: J1.9.0 U5.6 U6.B5 | length 14.9
  L2 w0.125: v3(3.646,8.695) 3.95,8.391 3.95,7.45 3.5,7 3.5,6.625 3.938,6.187 4.912,6.187 5.125,6.4 v7(6.288,6.4)
  L2 w0.15: 0.6,9.125 0.7,9.225 2.845,9.225 3.035,9.035 3.306,9.035 v3(3.646,8.695)
  L2 w0.3: J1.9.0@-0.025,9.125 0.6,9.125
  L3 w0.15: v6(3.625,13.751) 3.512,13.638 3.512,13.102 4.113,12.502 4.113,10.312 3.625,9.825 3.625,8.716 v3(3.646,8.695)
  other v5: 3.625,13.75
BT_ANT: A2.1 C53.2 L9.2 | length 5
  L1 w0.1: A2.1@4.166,19.534 cw(c4.508,19.875) A2.1@4.025,19.875 ccw(c4.749,19.875) A2.1@4.237,19.363 ; A2.1@4.25,19.125 4.404,19.125 cw(c4.404,18.713) 4.696,19.004 5.373,18.327 cw(c4.22,17.175) 5.85,17.175 ccw(c6.393,17.175) 6.009,16.791 C53.2@6.215,16.585 L9.2@6.215,16.06 L9.2@6.215,15.985
BT_RADIO_ANT: C52.2 L9.1 U6.D1 | length 1.7
  L1 w0.1: U6.D1@5.225,14.55 5.876,14.55 ccw(c5.876,14.984) 6.183,14.677 ccw(c6.105,14.755) 6.215,14.755 C52.2@6.215,14.935 6.211,14.931 ccw(c5.775,15) 6.215,14.965 L9.1@6.215,15.385
DCC: L8.1 U6.B6 | length 2.8
  L2 w0.25: v5(3.225,13.75) 3.212,13.737 3.212,12.4 3.698,11.915 v1(4.448,11.915)
DEC1: C47.2 U6.B7 | length 1.1
  L1 w0.1: 2.6,13.75 U6.B7@2.825,13.75
  L1 w0.15: C47.2@2.125,14.25 2.425,14.25 2.475,14.2 2.475,13.875 2.6,13.75
DEC2: C51.2 U6.A2 | length 0.9
  L1 w0.1: 4.825,12.925 U6.A2@4.825,13.35
  L1 w0.18: 4.825,12.925 5,12.75 C51.2@5.275,12.75
DEC3: C50.2 U6.C2 | length 1
  L1 w0.1: U6.C2@4.825,14.15 5.125,14.15
  L1 w0.15: 5.125,14.15 ccw(c5.185,14.21) 5.185,14.125 C50.2@5.85,14.125
DEC4: C44.2 L7.2 U6.A6 | length 3.9
  L1 w0.1: U6.A6@3.225,13.35 3.225,13.2 3.425,13
  L1 w0.18: 3.425,13 4.125,13 4.725,12.4 5.45,12.4 L7.2@5.8,12.05 ; L7.2@5.8,12.025 5.825,12 C44.2@6.5,12
DW_CS: U1.24 U6.G3 | length 11.8
  L1 w0.2: v3(9.7,12.2) 9.875,12.025 U1.24@9.875,10.925
  L3 w0.1: 4.337,16.487 4.125,16.275 4.125,16.043 4.393,15.775 v6@4.399,15.775
  L3 w0.125: 4.337,16.487 4.75,16.9 6.472,16.9 6.984,16.388 8.347,16.388 9.313,15.423 9.313,14.74 8.875,14.302 8.875,13.2
  L3 w0.2: 8.875,13.2 8.875,13.025 v3(9.7,12.2)
  other v1: 9.7,12.2
  other v5: 4.425,15.75
  other v6: 4.425,15.75
DW_EXTON: U1.21 U3.4 | length 16.7
  L1 w0.15: v12(3.3,2.8) 3.4,2.9 U3.4@3.725,2.9
  L2 w0.15: 3.3,1.925 3.3,1.625 3.5,1.425 5.525,1.425 5.975,1.875 5.975,4.175 6.25,4.45 7.15,4.45 7.35,4.65 v3(7.35,5) ; 3.3,1.95 v12(3.3,2.8) ; v3(8.413,8.812) 8.4,8.825 8.75,8.825 10.425,10.5 11.049,10.5 v1(11.075,10.526)
  L3 w0.15: v3(7.35,5) 7.8,5 8.15,5.35 8.15,5.8 8.4,6.05 8.413,6.063 v3(8.413,8.812)
DW_GP0: J1.22.0 U1.38 | length 12
  L1 w0.2: v2(9.475,3.875) 9.79,3.875 10.275,4.36 U1.38@10.275,5.225
  L6 w0.2: v2(9.475,3.875) 9.8,3.875 11.025,5.1 J1.22.0@19.075,5.1
DW_GP1: J1.21.0 U1.37 | length 14
  L1 w0.2: v2(8.425,4.725) 8.45,4.75 9.775,4.75 9.875,4.85
  L6 w0.2: v2(8.425,4.725) 8.425,3.825 8.875,3.375 9.899,3.375 11.159,4.635 16.44,4.635 16.9,4.175 J1.21.0@19.125,4.175
DW_GP2: J1.31.0 U1.36 | length 17.8
  L1 w0.2: U1.36@9.225,5.875 9.32,5.78 v2(9.32,5.23)
  L6 w0.2: v2(9.32,5.23) 10.256,5.23 10.766,5.74 15.35,5.74 16.07,6.46 16.07,12.219 17.165,13.315 17.165,13.885 17.43,14.15 J1.31.0@18.825,14.15 J1.31.0@19.075,14.15
DW_GP3: J1.30.0 U1.35 | length 19.1
  L1 w0.2: v2@8.65,5.4 8.5,5.55 8.5,6.1 8.675,6.275 U1.35@9.225,6.275
  L6 w0.2: v2(8.625,5.4) 8.625,5.324 9.144,4.805 10.255,4.805 10.89,5.44 15.474,5.44 16.39,6.356 16.39,12.115 17.375,13.1 J1.30.0@18.45,13.1 ; J1.30.0@18.45,13.15 J1.30.0@18.825,13.15 J1.30.0@19.1,13.15
DW_IRQ: U1.45 U6.F3 | length 17.9
  L1 w0.2: U1.45@13.075,5.225 13.075,4.885 13.35,4.61 v1@13.35,4.45
  L2 w0.2: v3(8.86,5.99) 9.235,5.99 9.35,5.875 12.725,5.875 13.35,5.25 v1@13.35,4.45
  L3 w0.125: v5(4.425,15.35) 4.424,14.945 4.731,14.638 5.087,14.638 7.563,12.162 7.563,11.795 8.725,10.633 8.725,6.125 v3(8.86,5.99)
  other v1: 13.36,4.45
  other v6: 4.424,15.35
DW_RF_N: C23.2 U1.17 | length 1.9
  L1 w0.255: C23.2@12.555,13.075 12.682,12.948 U1.17@12.682,11.268
DW_RF_P: C21.2 U1.16 | length 1.9
  L1 w0.255: U1.16@13.067,11.26 13.067,12.972 C21.2@13.17,13.075
DW_RST: U1.27 U6.E1 | length 8.2
  L1 w0.15: v1@8.675,9.475 U1.27@9.225,9.475
  L2 w0.15: v5(5.225,14.95) 5.255,14.98 v6(5.41,14.98) ; v3(8.35,11.47) 8.382,11.438 8.715,11.438 9.16,10.993 9.16,9.935 v1(8.7,9.475)
  L3 w0.15: v6(5.41,14.98) 7.8,12.59 7.8,12.02 v3(8.35,11.47)
GND: C1.1 C2.1 C3.1 C4.1 C5.1 C6.1 C7.2 C8.2 C9.2 C10.2 C14.1 C15.1 C16.1 C17.1 C18.1 C20.2 C22.1 C24.1 C25.1 C26.1 C27.1 C28.1 C29.1 C30.1 C31.1 C32.1 C33.1 C34.1 C35.1 C36.1 C37.1 C38.1 C39.1 C41.1 C43.1 C44.1 C45.1 C46.1 C47.1 C48.1 C49.1 C50.1 C51.1 C52.1 C53.1 C54.1 C55.1 C57.1 C58.1 D2.A J1.1.0 J1.11.0 J1.24.0 J1.34.0 J35.2 J35.3 J35.4 J35.5 pad.0 pad.1 R1.2 SH1.0 U1.22 U1.23 U1.32 U1.43 U1.46 U1.EP U2.2 U2.5 U3.0 U3.2 U3.5 U4.6 U4.8 U5.3 U5.8 U5.9 U6.C4 U6.C5 U6.D2 U6.E3 U6.F5 U7.6 U7.7 X1.2 X1.4 X2.2 X2.4 | length 66.2
  L1 w0.1: v1(2.225,5) 2.35,5 C45.1@2.35,5.35 ; U5.3@7.55,6.913 7.837,6.913 v1(7.9,6.85) ; C18.1@7.88,9.075 7.88,9.33 v8@7.9,9.35
  L1 w0.125: C43.1@4.45,7.75 4.45,8 4.525,8.075 v1(4.6,8.075) ; C22.1@16.425,1.725 v1(16.8,1.725) ; C8.2@16.575,7.425 17.15,7.425 ; R1.2@16.65,6.9 v1@17.14,6.9 ; 17.075,7.075 17.1,7.05
  L1 w0.14: v1(16.925,4.55) C38.1@16.925,4.9
  L1 w0.15: v1@1.6,11.05 v1@1.625,11.075 ; SH1.0@1.65,10.775 C6.1@2.15,10.775 ; C50.1@6.45,14.125 v1(6.45,14.52) ; C52.1@6.815,14.935 7.14,14.935 v1(7.15,14.925) ; C53.1@6.815,16.585 6.975,16.425 v1(7.15,16.425) ; C49.1@8.325,14.225 v1(8.325,14.625) ; X2.4@14.56,4.05 X2.4@14.87,3.74 ; C4.1@15.225,4.525 v1(15.225,4.9) ; C7.2@16.55,7.95 v1@16.92,7.95 ; C15.1@16.825,10.2 v1(17.175,10.2) ; C16.1@16.825,11.325 v1@16.825,11.7
  L1 w0.18: 1.525,11.925 C46.1@2.125,11.925
  L1 w0.2: SH1.0@1.35,15.4 SH1.0@1.375,15.375 ; SH1.0@1.4,15.35 SH1.0@1.375,15.375 ; SH1.0@1.475,9.5 C3.1@2.125,9.5 ; SH1.0@1.555,14.845 1.55,14.85 C47.1@2.125,14.85 ; SH1.0@1.625,13.775 SH1.0@1.635,13.785 ; SH1.0@1.635,13.7 C55.1@2.125,13.7 ; C54.1@2.125,15.4 1.4,15.4 SH1.0@1.375,15.375 ; U3.5@3.725,2.4 4.6,2.4 U3.0@4.65,2.35 ; SH1.0@4,0.95 4.1,0.85 4.4,0.85 SH1.0@4.7,1.15 ; U3.0@4.7,2.4 U3.2@5.675,2.4 ; v1(7.7,10.815) 7.715,10.83 C14.1@8.09,10.83 ; C17.1@7.81,9.875 v1(7.81,10.225) ; U1.32@9.225,7.475 U1.EP@10.45,7.475 ; U1.EP@10.275,9.9 U1.23@10.275,10.925 ; U1.EP@10.675,9.55 U1.EP@12.075,8.15 ; U1.EP@10.675,10.225 U1.22@10.675,10.658 ; SH1.0@11.16,17.52 v9(11.205,17.475) ; v2@11.18,15.22 v2@11.345,15.055 ; v2@11.315,15.025 U2.2@12.195,15.025 ; C29.1@11.425,11.925 C28.1@11.425,12.35 ; U1.EP@11.475,7.55 U1.EP@12.075,8.15 ; U1.43@12.275,5.3 U1.EP@12.275,7.95 ; 13.33,16.85 SH1.0@13.685,16.85 ; 13.35,17.01 SH1.0@13.705,17.01 ; U1.46@13.475,5.3 13.475,6.75 U1.EP@12.275,7.95 ; SH1.0@13.75,16.975 SH1.0@13.775,17 ; C5.1@14.175,4.05 X2.4@14.56,4.05 ; C20.2@14.375,11.75 v1(14.775,11.75) ; 17.7,12.775 SH1.0@17.7,15.4 ; SH1.0@17.725,10.55 SH1.0@17.775,10.5 ; U1.EP@12.075,8.15 U1.EP@12.275,7.95
  L1 w0.3: SH1.0@1.425,7.7 D2.A@2.3,7.7 ; SH1.0@1.625,8.35 C36.1@2.5,8.35 ; U2.2@12.355,15.025 v16(12.88,15.025) U2.5@13.555,15.025 U2.5@13.64,15.025
  L1 w0.7: J1.11.0@0.3,7.15 v1(1.125,7.15) SH1.0@1.4,7.425 ; J1.1.0@0.3,17.15 1.45,17.15 SH1.0@1.475,17.175 ; SH1.0@17.675,17.175 17.7,17.15 J1.24.0@19.125,17.15
  L1 w0.8: 17.55,7.15 J1.34.0@18.7,7.15 ; SH1.0@17.725,7.175 v1@17.8,7.1
  L2 w0.125: v5@4.426,14.949 v5(4.825,14.55)
  L2 w0.7: J1.11.0@0.05,7.175 0.75,7.175 0.775,7.15 ; 16.85,7.125 J1.34.0@19.1,7.125 ; 18.229,17.15 J1.24.0@19.125,17.15
  L4 w0.7: J1.11.0@0,7.175 1.35,7.175 ; J1.1.0@0.275,17.15 2,17.15 ; 17.475,17.15 J1.24.0@19.125,17.15 ; 17.625,7.175 J1.34.0@19.125,7.175
  L3 w0.7: J1.1.0@0,17.15 1.675,17.15 ; 17.45,17.15 J1.24.0@19.125,17.15
  L5 w0.7: J1.11.0@0,7.15 1.45,7.15 ; J1.1.0@0,17.15 1.475,17.15 ; 17.725,17.15 J1.24.0@19.125,17.15 ; 17.775,7.15 J1.34.0@19.125,7.15
  L6 w0.7: J1.1.0@0.2,17.125 1.825,17.125 ; J1.11.0@0.3,7.175 1.975,7.175 ; 16.975,7.175 J1.34.0@18.825,7.175 ; 17.1,17.15 J1.24.0@18.825,17.15
  other v1: 11.2,0.6 1.1,0.625 1.675,0.625 5.25,0.625 7.925,0.625 8.975,0.625 15.55,0.625 16.4,0.625 17.975,0.625 2.47,0.65 10.15,0.65 17.075,0.65 13.9,0.675 14.725,0.675 2.47,1.09 5.25,1.075 8.975,1.075 11.15,1.075 13.9,1.075 15.525,1.075 1.675,1.1 7.9,1.1 10.125,1.1 17.075,1.1 1.1,1.125 17.5,1.425 17.95,1.425 1.1,1.85 1.575,1.85 4.475,1.925 4.95,1.925 11.44,2.11 16.85,2.25 17.95,2.3 17.525,2.325 1.15,2.4 4.475,2.4 4.95,2.4 1.6,2.425 11.525,2.65 16.325,2.725 1.1,3 1.55,3.025 17.975,3.125 17.55,3.15 3.5,3.325 3.925,3.325 4.375,3.325 15.125,3.575 1.1,3.8 1.55,3.825 12.85,3.85 17.95,4.05 7.05,4.1 7.6,4.2 1.23,4.35 1.6,4.79 6.8,4.8 17.5,4.8 17.975,4.8 4.3,4.95 4.8,4.95 6.55,5.4 7.05,5.4 17.2,5.45 16.75,5.475 17.7,5.6 1.73,5.95 17.95,6.225 16.73,6.38 1.075,6.7 17,6.9 8.425,7.05 17.35,7.175 17.875,7.175 18.4,7.175 1.6,7.3 16.975,7.45 17.525,7.925 16.95,7.95 17.975,7.95 1.21,8.17 1.59,8.42 17.525,8.5 5.65,8.8 5,8.9 17.525,9.2 6.15,9.3 1.575,9.575 1.15,9.6 16.3,9.625 6,9.9 17.525,10 1.125,10.125 1.55,10.125 17.99,10.26 17.975,10.725 17.525,10.75 6.575,11.1 1.525,11.125 17.5,11.35 18.05,11.375 15.21,11.61 16.825,11.675 10.3,11.725 7.537,11.75 1.075,11.775 1.5,11.775 15.6,11.8 16.3,11.8 17.55,11.975 18.075,12 1.075,12.25 10.275,12.25 1.525,12.275 11.43,12.37 17.2,12.4 16.45,12.575 18.075,12.625 17.525,12.675 5.875,12.75 1.05,12.775 10.3,12.775 1.55,12.8 14.555,12.795 11.38,12.9 14.375,13.175 1.375,13.275 10.3,13.3 18,13.325 17.5,13.35 8.725,13.625 1.4,13.825 18,13.825 17.525,13.85 1.4,14.45 17.525,14.575 18,14.575 1.7,15.15 17.525,15.2 18,15.2 10.62,15.23 1.7,15.775 10.425,15.89 11.125,15.89 17.525,15.925 18,15.925 17.5,16.575 17.975,16.575 7.25,16.9 8.05,16.925 8.975,16.95 10.225,16.95 10.8,16.95 13.6,16.97 17.17,16.96 9.55,16.975 14,16.975 16.6,16.98 4.52,17.08 5.07,17.08 6.55,17.09 8.575,17.2 17.7,17.2 8.975,17.425 10.8,17.425 14,17.42 9.55,17.45 10.25,17.45 16.6,17.45 4.69,17.47 5.3,17.47 7.225,17.475 8.125,17.475 13.52,17.46 17.16,17.46 4.11,17.48 6.55,17.5
  other v2: 11.658,6.475 13.775,6.475 12.717,6.525 10.83,6.61 10.6,7.475 11.658,7.475 13.775,7.475 12.717,7.525 10.6,8.475 11.658,8.475 13.775,8.475 12.717,8.525 11.55,9.45 10.6,9.475 12.67,9.49 13.74,9.53 15.25,12.52 13.87,13.025 14.96,13.14 16.28,13.71 15.275,13.875 14.435,13.975 3.775,14.6 16.6,14.7 14.435,14.725 15.35,14.775 11.275,15.025 14.35,15.35 16.625,15.675 15.4,15.775 14.305,16.035 13.06,16.175 13.665,16.185 7.625,17.2 13.01,17.21 13,18.125 11.125,18.15 7,19 8,19 9,19 10,19 11.1,19 13,19 14,19 15,19 16,19 17,19 18,19 7,20 8,20 9,20 10,20 11.1,20 13.05,20 14,20 15,20 16,20 17,20 18,20 11.1,20.975 13.05,20.975 7,21 8,21 9,21 10,21 14,21 15,21 16,21 17,21 18,21 7,21.9 8,21.9 9,21.9 10,21.9 11.1,21.9 13.05,21.9 14,21.9 15,21.9 16,21.9 17,21.9 18,21.9 6.5,22.3 7.5,22.3 8.5,22.3 9.5,22.3 10.5,22.3 13.5,22.3 14.5,22.3 15.5,22.3 16.5,22.3 17.5,22.3
  other v3: 12.925,3.325 14.875,3.475 15.4,3.975 17.29,4.29 10,4.37 15.375,4.775 7.05,5.975 15.4,6.025 15.35,7.025 7.575,7.85 15.4,7.95 17.175,8.075 15.375,8.975 15.35,9.75 12.775,10.25 13.25,10.25 12.3,10.275 13.7,10.275 12.05,10.725 15.35,10.775 13.75,10.85 13.75,11.55 16.65,11.975 7.125,12 12.025,12 12.02,12.55 13.75,12.55 12.015,13.06 11.375,13.505 11.45,14.1 11.45,14.625
  other v4: 5,2 6,2 7,2 8,2 13,2 15,2 16,2 17,2 2,3 5,3 6,3 7,3 15,3 16,3 17,3 2,4 5,4 16,4 2,5 3,5 2.85,5.95 2,6 4.65,6.15 5.25,6.15 2,7 2,8 2.85,8.05 6.4,8.7 2,9 3,9 3,10 6.3,10.05 2,11 2,12 3,12 2,13 3,13 4,13 2,14 3,14 4,14 5,14 2,15 3,15 5,15 2,16 3,16 4,16 5,16 6,16 7,16
  other v5: 6.4,12.75 3.625,14.149 4.025,14.149 4.425,14.949 3.625,15.349
  other v7: 14.725,1.075 16.35,1.075 12.325,3.85 17.5,4.05
  other v8: 9.025,4.325 7.925,9.475
  other v9: 10.67,16.38 11.26,16.43 11.22,16.97
  other v10: 10.35,1.79 12,2.13 10.81,2.24
  other v11: 6.125,0.9 7,0.9 17.275,6.375
GPIO5: T2.1 U1.33 | length 3.9
  L1 w0.1: T2.1@8.25,4.05 8,4.3 8,5 8.25,5.25 8.25,6.204 8.613,6.566 8.613,6.725 8.75,6.862 8.75,7.05 8.775,7.075 U1.33@9.225,7.075
GPIO6: T3.1 U1.30 | length 1.5
  L1 w0.1: T3.1@7.95,8.15 8.1,8 8.5,8 8.775,8.275 U1.30@9.225,8.275